# Altium PCB IPM_IGCM10F60GA_xxy_v1_2_1219.PcbDoc
Units mm, origin at the board's own origin, x right, y up, seen from the top; angles counter-clockwise.
Board outline 80.27 x 80.35 mm, 2 copper layers (Top Layer, Bottom Layer); 37 components, 29 nets, 114 pads, 6 vias.
Unrouted connection lines stored in the file: 1.
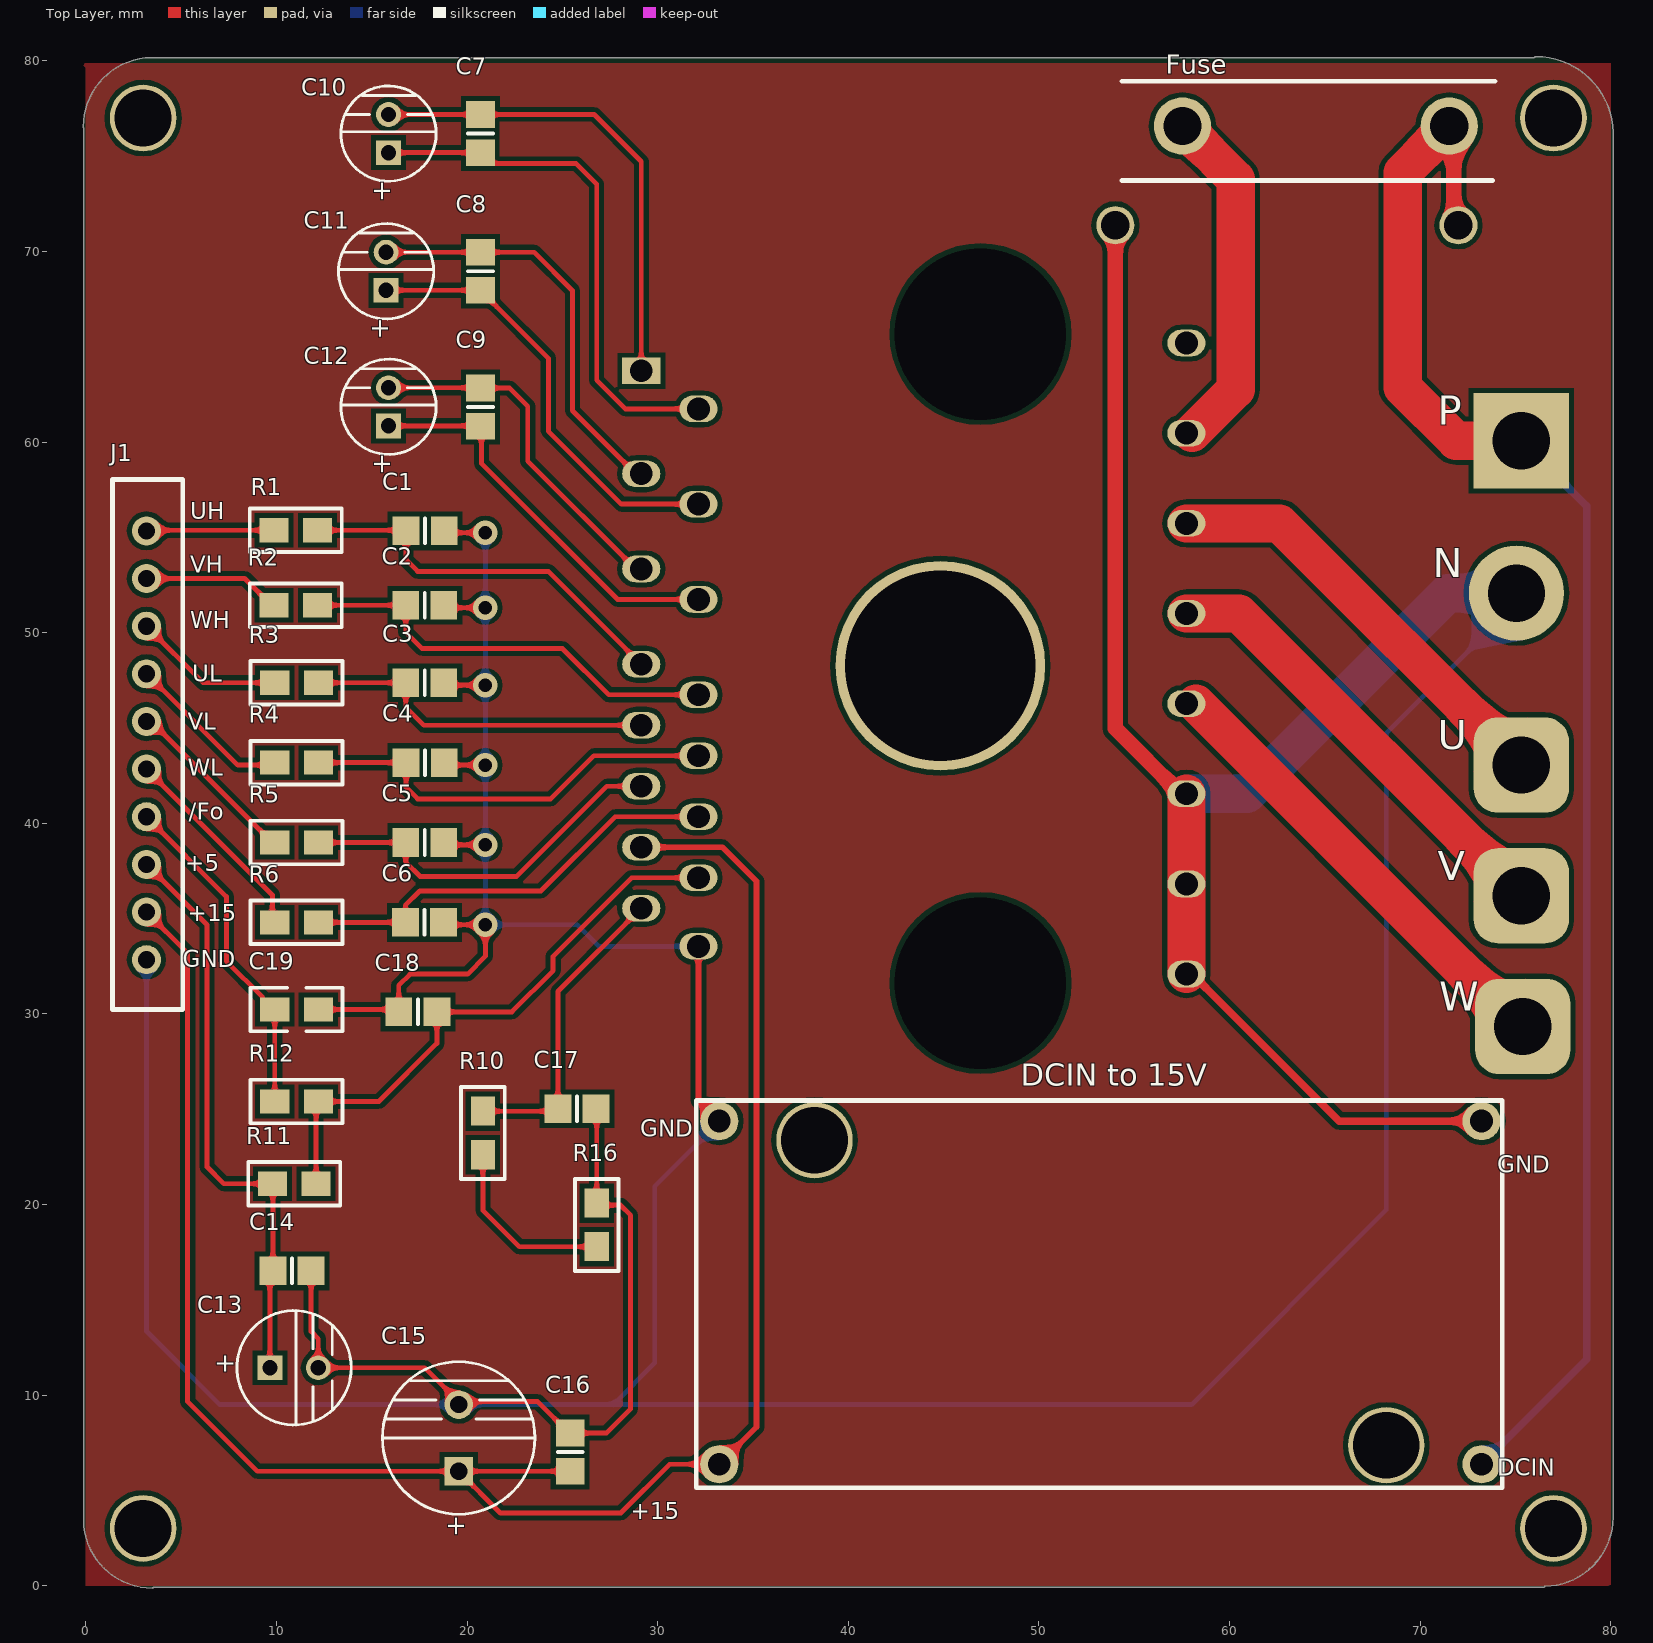
[diagram p0: Top Layer view]
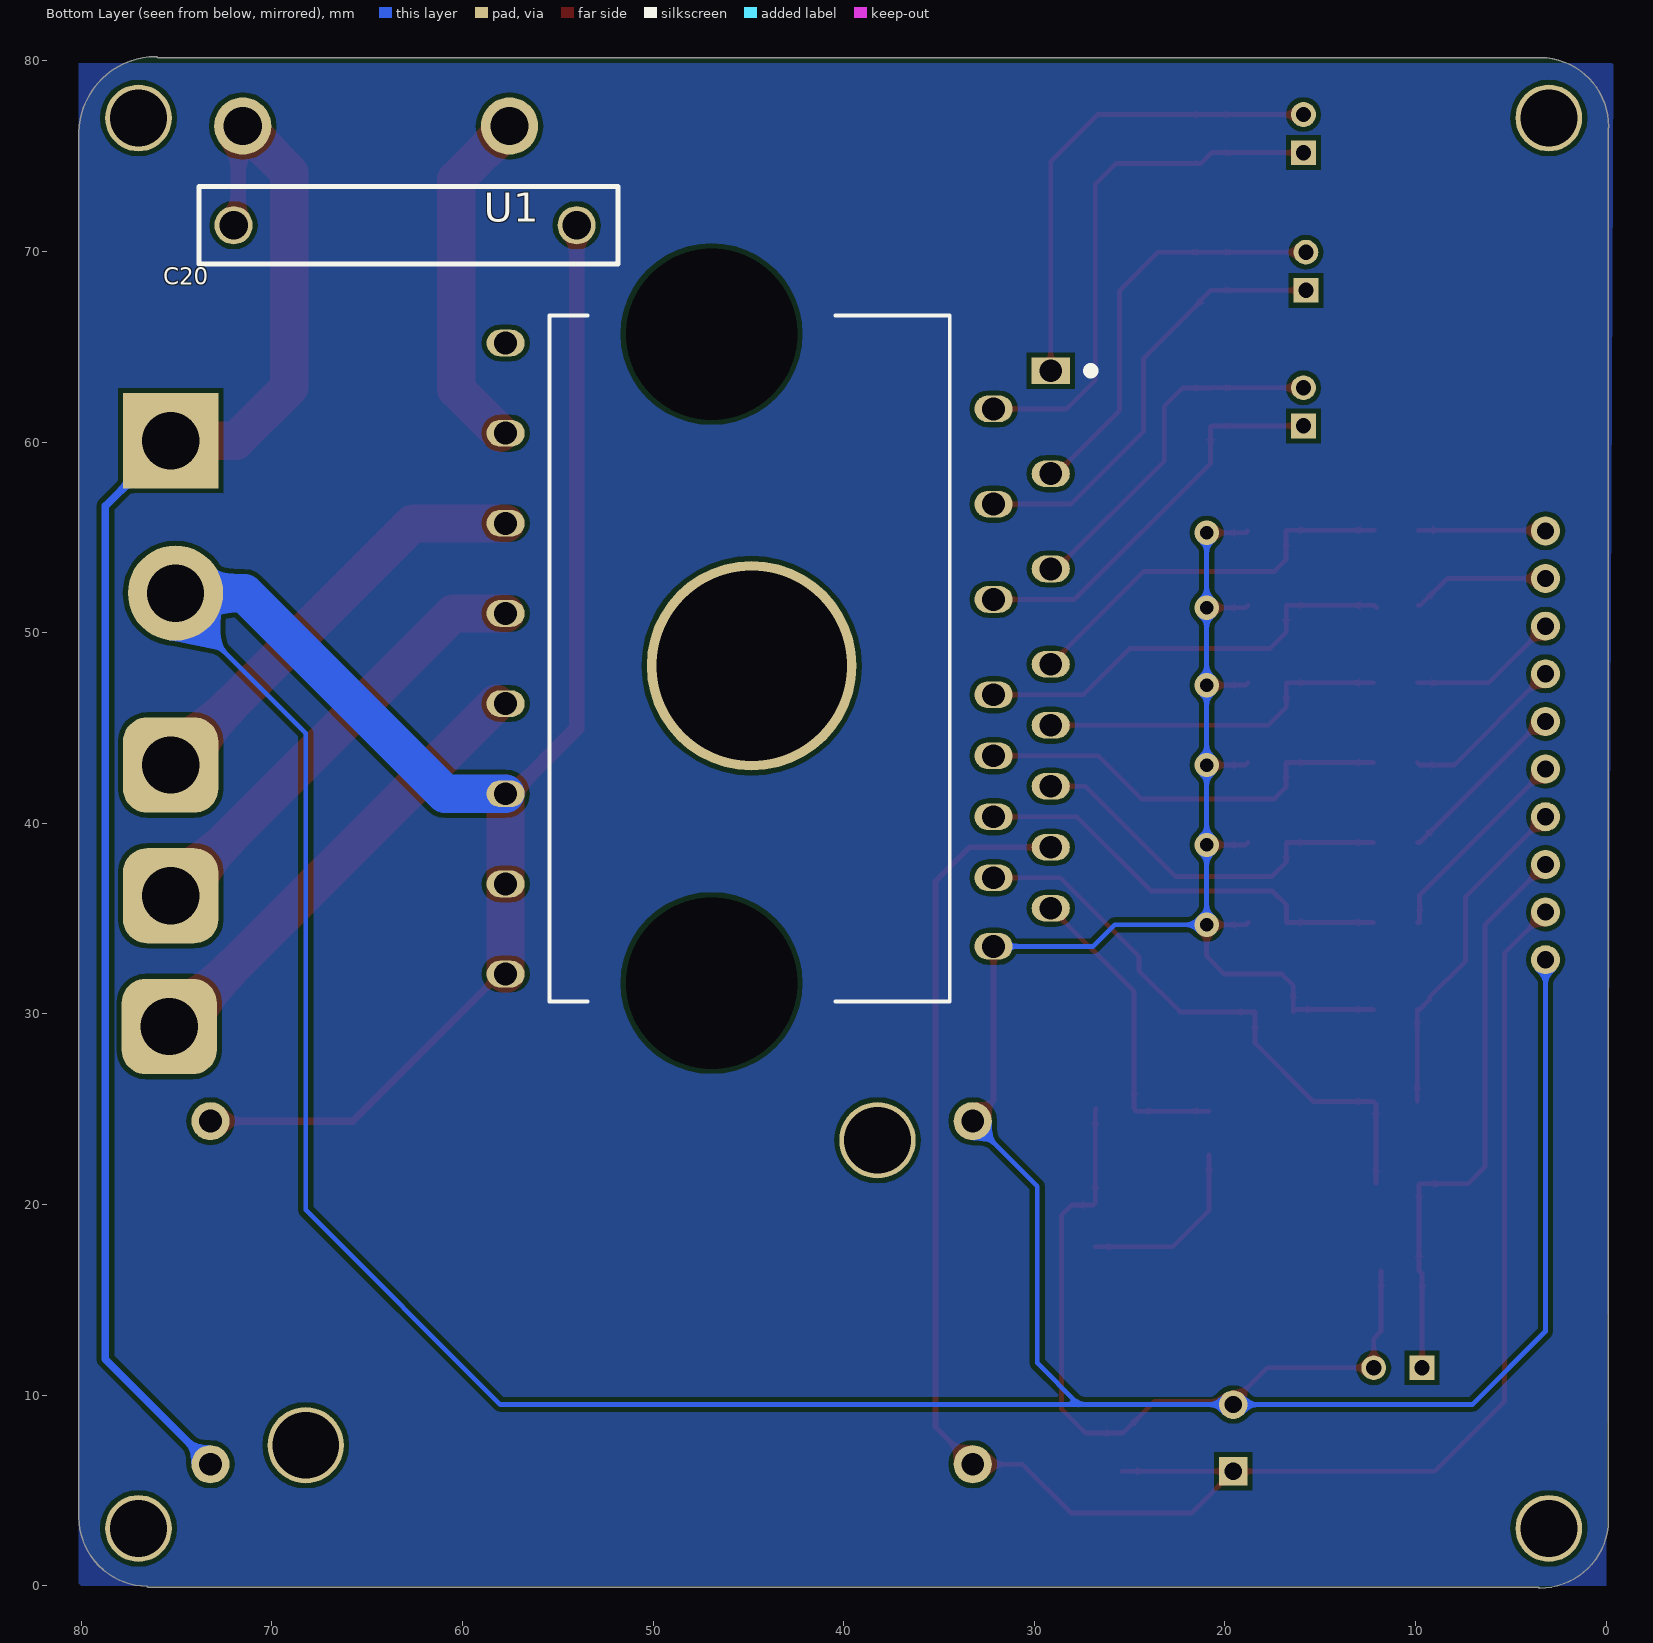
[diagram p1: Bottom Layer view, seen from below]

## Layer stack, top to bottom
Top Solder: solder mask 0.0102, Solder Resist, Dk 3.5
Top Layer: signal copper 0.0356
Dielectric 1: dielectric 0.32, FR-4, Dk 4.8
Bottom Layer: signal copper 0.0356
Bottom Solder: solder mask 0.0102, Solder Resist, Dk 3.5

## Board outline
-0.127,3.402 cw(c0.001,3.404) -0.123,3.434 cw(c0,3.467) -0.127,3.467 -0.127,76.482 cw(c-0.015,76.542) -0.142,76.542 cw(c3.492,76.542) 3.427,80.175 cw(c3.429,80.048) 3.429,80.175 75.99,80.175 cw(c76.086,80.091) 76.086,80.218 cw(c76.086,76.177) 80.127,76.25 cw(c79.999,76.248) 80.127,76.248 cw(c79.999,76.248) 80.122,76.213 cw(c80,76.177) 80.127,76.177 80.127,3.584 cw(c80,3.584) 80.127,3.582 ccw(c76.493,3.594) 80.127,3.594 80.127,3.582 cw(c76.493,3.594) 76.559,-0.04 cw(c76.556,0.088) 76.556,-0.04 cw(c76.464,0.048) 76.464,-0.08 3.566,-0.08 cw(c3.467,0) 3.467,-0.127 cw(c3.467,3.467)

## Design rules (kind name [scope] priority, off if disabled: settings)
Clearance [All] p1: gap=0.254 ignorepadtopadclearanceinfootprint=FALSE except(0: Arc-Hole Track-Hole SMDPad-Hole THPad-Hole Via-Hole Fill-Hole Poly-Hole Region-Hole Text-Hole)
PolygonConnect [All] p1: connectstyle=Relief reliefconductorwidth=0.254 reliefentries=4 polygonreliefangle="90 Angle" airgapwidth=0.254
RoomDefinition IPM_IGCM10F60A_xxy_v1_2 [InComponentClass('IPM_IGCM10F60A_xxy_v1_2')] p1: confinementstyle=ConfineIn formatcopy=TRUE lockcomponents=FALSE outline -0.254,-0.127 80,-0.127 80,79.883 -0.254,79.883
RoutingVias [All] p1: holewidth=0.711 width=1.27 viastyle="Through Hole" minholewidth=0.711 minwidth=1.27 maxholewidth=0.711 maxwidth=1.27
SolderMaskExpansion [All] p1: expansion=0.102
Width [All] p1: maxlimit=3 minlimit=0.254 preferedwidth=0.254 minimp=50.000000 maximp=50.000000 favimp=50.000000
30 further rules are at their usual default settings.

## Components (designator, comment, footprint, x,y, rotation, side; value= is the part's Value field where it differs from the comment)
C1 "" 6-0805_M 17.796,55.339 r180 top
C2 "" 6-0805_M 17.78,51.435 r180 top
C3 "" 6-0805_M 17.78,47.371 r180 top
C4 "" 6-0805_M 17.796,43.18 r180 top
C5 "" 6-0805_M 17.78,38.989 r180 top
C6 "" 6-0805_M 17.764,34.798 r180 top
C7 "" 6-0805_M 20.701,76.184 r90 top
C8 "" 6-0805_M 20.701,68.961 r90 top
C9 "" 6-0805_M 20.701,61.833 r90 top
C10 "" 电解电容5*7mm 15.875,76.184 r90 top
C11 "" 电解电容5*7mm 15.748,68.961 r90 top
C12 "" 电解电容5*7mm 15.875,61.849 r90 top
C13 "" 电解电容6*12mm 10.922,11.43 r0 top
C14 "" 6-0805_M 10.811,16.51 r180 top
C15 "" 电解电容8*12mm 19.558,7.747 r90 top
C16 "" 6-0805_M 25.4,7.003 r270 top
C17 "" 6-0805_M 25.765,25.019 r0 top
C18 "" 6-0805_M 17.415,30.099 r180 top
C19 "" 0805C 12.192,30.226 r180 top
C20 "" 安规电容 63.009,71.374 r0 bottom
J1 "J1(10 pin)" 10_pin_插座 3.175,45.339 r270 top
N "" N_footprint 75.057,52.07 r90 top
P "" P_footprint 75.311,60.071 r90 top
R1 "100" 0805R 9.865,55.372 r0 top
R2 "100" 0805R 9.865,51.435 r0 top
R3 "100" 0805R 9.906,47.371 r0 top
R4 "100" 0805R 9.906,43.18 r0 top
R5 "100" 0805R 9.906,38.989 r0 top
R6 "100" 0805R 9.906,34.798 r0 top
R10 "" 0805R 20.828,24.892 r270 top
R11 "" 0805R 12.074,21.082 r180 top
R12 "" 0805R 12.192,25.4 r180 top
R16 "" 0805R 26.797,17.78 r90 top
U "" U_V_W_footprint 75.311,43.053 r90 top
U1 "IGCM10F60A" "INF-CIPOS MINI" 43.434,48.641 r270 bottom
V "" U_V_W_footprint 75.311,36.195 r90 top
W "" U_V_W_footprint 75.385,29.337 r90 top

## Footprints (in the part's own frame and the unit in brackets; to place one, negate y for a bottom-side part, rotate by r counter-clockwise, add the part's x,y. Pads: shape width x height; smd on the part's side, far side on the other; paste and mask are expansions set on the pad)
6-0805_M [mm] "Chip Resistor, Body 2.0x1.2mm, IPC Low Density"
  rect 1.4x1.5 smd: 1(-1,0) 2(1,0)
  silkscreen extent 0,-0.65 0,0.65, body extent -1.07,-0.7 1.07,0.7, height 0.7
10_pin_插座 [mil]
  round 60 hole 35.43: 1(-393.7,0) 2(-295.28,0) 3(-196.85,0) 4(-98.43,0) 5(0,0) 6(98.43,0) 7(196.85,0) 8(295.28,0) 9(393.7,0) 10(492.13,0)
  silkscreen extent -500,-70 595,75
0805C [mil] "2.0mmx1.2mm（蒜米工坊）"
  rect 60x50 smd: 1(0,0) 2(90,0)
  silkscreen extent -50,-45 140,45, body extent 5,-25 83,25, height 22
0805R [mil]
  rect 60x50 smd: 1(0,0) 2(90,0)
  silkscreen extent -50,-45 140,45, body extent 5,-25 83,25, height 22
"INF-CIPOS MINI" [mm] "CIPOS MINI;24 pin, 21mm W X 36mm L X 5.6mm H body"
  rect 1.4x2 hole 1.2 paste+0 mask+0: 1(-15.1,14.3)
  oval 1.4x2 hole 1.2 paste+0 mask+0: 2(-13.1,11.3) 3(-9.7,14.3) 4(-8.1,11.3) 5(-4.7,14.3) 6(-3.1,11.3) 7(0.3,14.3) 8(1.9,11.3) 9(3.5,14.3) 10(5.1,11.3) 11(6.7,14.3) 12(8.3,11.3) 13(9.9,14.3) 14(11.5,11.3) 15(13.1,14.3) 16(15.1,11.3) 17(16.555,-14.3) 18(11.825,-14.3) 19(7.095,-14.3) 20(2.365,-14.3) 21(-2.365,-14.3) 22(-7.095,-14.3) 23(-11.825,-14.3) 24(-16.555,-14.3)
  round 0 hole 9 unplated paste+0 mask+0: ""(-17.025,-3.5) ""(17.025,-3.5)
  silkscreen extent -18,-12 18,16.6, body extent -18,-14.56 18,14.56, height 5.61
N_footprint [mm]
  round 5 hole 3: 4(0,0)
P_footprint [mm]
  rect 5x5 hole 3: 3(0,0)
U_V_W_footprint [mm]
  rrect50% 5x5 hole 3: 5(0,0)
安规电容 [mm]
  round 2 hole 1.5: 8(-9,0) 8(9,0)
  silkscreen extent -11.18,-2.03 10.82,2.03
电解电容5*7mm [mm]
  rect 1.3x1.3 hole 0.8: 1(-1,0)
  round 1.3 hole 0.8: 2(1,0)
  silkscreen extent -2.5,-2.5 2.5,2.5
电解电容6*12mm [mm]
  rect 1.3x1.3 hole 0.8: 1(-1.27,0)
  round 1.3 hole 0.8: 2(1.27,0)
  silkscreen extent -3,-3 3,3
电解电容8*12mm [mm]
  rect 1.5x1.5 hole 0.9: 1(-1.75,0)
  round 1.5 hole 0.9: 2(1.75,0)
  silkscreen extent -4,-4 4,4

## Part data
C1 C2 C3 C4 C5 C6 C7 C8 C9 C14 C16 C17 C18 C19 C20: library part C, "无极性贴片电容", BOM名称=无, 学习资源=www.oooc
C10 C11 C12 C13 C15: library part C-CAP, "直插电解电容", BOM名称=ֱ, 学习资源=www.oooc
N P U V W: library part 输出端口
R1 R2 R3 R4 R5 R6 R10 R11 R12 R16: library part R, "贴片电阻", BOM名称=Ì, 学习资源=www.oooc
U1: library part Component_1

## Free pads (board coordinates)
  round 3 hole 2: 18(57.531,76.581) 18(71.531,76.581)
  round 4 hole 3.5: 21(38.227,23.368) 21(68.227,7.368)
  round 2 hole 1.2: 22(33.227,6.368) 22(33.227,24.368) 22(73.227,6.368) 22(73.227,24.368)
  round 3.5 hole 3: 25(3,3) 25(3,77) 25(77,3) 25(77,77)
  round 11 hole 10: 26(44.831,48.26)

## Via types
v1: diameter 1.27, hole 0.711, Top Layer to Bottom Layer, 6 vias

## Nets (pads, with @x,y where several pads share a name; then routed paths per layer and width w, separated by ;. In a path a pad name is that pad's centre, name@x,y a point inside that pad or via, vN(x,y) a via of type N, cw(c..) or ccw(c..) an arc to the next point about the centre after c; other vN are vias at no path point)
+5: C13.1 C14.2 J1.8 R11.2 | length 30.7
  Top Layer w0.254: J1.8 6.35,34.664 6.35,21.971 7.239,21.082 R11.2 9.811,21.059 C14.2 9.652,16.351 C13.1
+15: C15.1 C16.2 J1.9 pad.22@33.227,6.368 U1.13 | length 102.2
  Top Layer w0.254: J1.9 5.334,33.18 5.334,9.652 8.989,5.997 C15.1 ; C16.2 25.394,5.997 C15.1 ; U1.13@28.898,38.741 U1.13 ; pad.22@33.227,6.368 30.625,6.368 28.067,3.81 21.745,3.81 C15.1
  Top Layer w0.3: U1.13 33.395,38.741 35.179,36.957 35.179,8.32 pad.22@33.227,6.368
GND: C1.1 C2.1 C3.1 C4.1 C5.1 C6.1 C13.2 C14.1 C15.2 C16.1 C17.2 C18.2 C19.1 C20.8@54.009,71.374 J1.10 N.4 pad.22@33.227,24.368 pad.22@73.227,24.368 R16.2 U1.16 U1.17 U1.18 U1.19 | length 333.4
  Top Layer w0.254: C14.1 11.811,13.335 12.192,12.954 C13.2 17.78,11.43 19.558,9.652 C15.2 19.713,9.652 23.701,9.652 C16.1@25.273,8.08 ; C19.1 16.288,30.226 C18.2 16.415,31.496 17.005,32.086 20.021,32.086 20.955,33.02 v1(20.955,34.671) 18.891,34.671 C6.1 ; C5.1 18.907,38.862 v1(20.955,38.862) ; C3.1 18.907,47.244 v1(20.955,47.244) ; C2.1 18.907,51.308 v1(20.955,51.308) ; C4.1 18.923,43.053 v1(20.955,43.053) ; C1.1 18.89,55.245 v1(20.955,55.245) ; C16.1@25.35,8.003 C16.1 27.307,8.003 28.575,9.271 28.575,19.431 28.045,19.961 26.902,19.961 R16.2 26.797,24.987 C17.2 ; U1.19@57.434,41.546 U1.19 ; U1.17 U1.17@58.034,32.086
  Top Layer w0.3: U1.16 32.134,25.461 pad.22@33.227,24.368
  Top Layer w0.4: U1.17@58.034,32.086 65.752,24.368 pad.22@73.227,24.368
  Top Layer w0.8: C20.8@54.009,71.374 54.009,44.971 U1.19@57.434,41.546
  Top Layer w2: U1.17 U1.18 U1.19
  Bottom Layer w0.254: J1.10 3.175,13.335 7.013,9.497 C15.2 27.658,9.497 ; v1(20.955,55.245) v1(20.955,51.308) v1(20.955,47.244) v1(20.955,43.053) v1(20.955,38.862) v1(20.955,34.671) 25.781,34.671 26.911,33.541 U1.16 ; pad.22@33.227,24.368 33.227,24.337 29.845,20.955 29.845,11.684 27.658,9.497 ; N.4@75.565,52.07 68.227,44.732 68.227,19.713 58.011,9.497 27.658,9.497
  Bottom Layer w2: U1.19 60.925,41.546 71.449,52.07 N.4 N.4@75.565,52.07
NetC1_2: C1.2 R1.2 U1.7 | length 20.8
  Top Layer w0.254: R1.2 16.763,55.372 C1.2 16.796,53.816 17.399,53.213 24.262,53.213 U1.7
NetC2_2: C2.2 R2.2 U1.8 | length 22.9
  Top Layer w0.254: R2.2@12.024,51.308 R2.2 C2.2 16.78,50.022 17.637,49.165 25.003,49.165 27.427,46.741 U1.8
NetC3_2: C3.2 R3.2 U1.9 | length 18.6
  Top Layer w0.254: R3.2 C3.2 16.78,46.085 17.724,45.141 U1.9
NetC4_2: C4.2 R4.2 U1.10 | length 22.4
  Top Layer w0.254: R4.2 C4.2 16.796,41.878 17.399,41.275 24.384,41.275 26.65,43.541 U1.10
NetC5_2: C5.2 R5.2 U1.11 | length 20.2
  Top Layer w0.254: R5.2 C5.2 16.78,37.957 17.526,37.211 22.606,37.211 27.336,41.941 U1.11
NetC6_2: C6.2 R6.2 U1.12 | length 22.8
  Top Layer w0.254: R6.2 C6.2 16.764,35.687 17.526,36.449 23.876,36.449 27.766,40.339 32.132,40.339 U1.12
NetC7_1: C7.1 C10.1 U1.2 | length 27.9
  Top Layer w0.254: C10.1 C7.1 21.274,74.611 25.719,74.611 26.797,73.533 26.797,63.246 28.302,61.741 U1.2
NetC7_2: C7.2 C10.2 U1.1 | length 25.3
  Top Layer w0.254: C10.2 C7.2 26.67,77.184 29.134,74.72 U1.1
NetC8_1: C8.1 C11.1 U1.4 | length 23.3
  Top Layer w0.254: C11.1 C8.1 20.751,67.961 21.324,67.388 21.324,67.338 24.262,64.4 24.262,60.574 28.095,56.741 U1.4
NetC8_2: C8.2 C11.2 U1.3 | length 21.9
  Top Layer w0.254: C11.2 C8.2 23.511,69.961 25.527,67.945 25.527,61.648 28.834,58.341 U1.3
NetC9_1: C9.1 C12.1 U1.6 | length 21.2
  Top Layer w0.254: C12.1 20.685,60.849 C9.1 20.751,60.833 20.751,58.878 27.888,51.741 U1.6
NetC9_2: C9.2 C12.2 U1.5 | length 18.9
  Top Layer w0.254: C12.2 20.685,62.849 C9.2 22.225,62.833 23.178,61.88 23.178,58.997 28.834,53.341 U1.5
NetC17_1: C17.1 R10.1 U1.15 | length 16.3
  Top Layer w0.254: R10.1 24.638,24.892 C17.1 24.765,31.172 U1.15
NetC18_1: C18.1 R11.1 R12.1 U1.14 | length 30.6
  Top Layer w0.254: R11.1 12.074,25.282 R12.1 15.367,25.4 18.415,28.448 C18.1 22.352,30.099 24.511,32.258 24.511,33.02 28.632,37.141 U1.14
NetC19_2: C19.2 J1.7 R12.2 | length 17.8
  Top Layer w0.254: J1.7 7.366,36.148 7.366,32.766 9.271,30.861 9.271,30.734 9.779,30.226 C19.2 R12.2
NetC20_2: C20.8@72.009,71.374 P.3 pad.18 pad.22@73.227,6.368 U1.23 | length 104.5
  Top Layer w0.254: pad.18@57.531,76.581 57.531,75.946 pad.18@58.166,75.946 ; U1.23 U1.23@58.034,60.466 ; pad.18@70.634,75.684 70.634,75.73 70.515,75.849 71.531,75.849 71.531,76.581 pad.18@71.77,76.342 ; C20.8@71.77,71.613 C20.8@72.009,71.374
  Top Layer w0.8: C20.8@71.77,71.613 pad.18@71.77,76.342
  Top Layer w2: U1.23@58.034,60.466 60.325,62.757 60.325,73.787 pad.18@58.166,75.946 ; pad.18@70.634,75.684 69.088,74.138 69.088,62.865 71.882,60.071 P.3
  Bottom Layer w0.4: pad.22@73.227,6.368 78.74,11.881 78.74,52.461 78.74,56.642 P.3
NetJ1_1: J1.1 R1.1 | length 6.7
  Top Layer w0.254: J1.1 3.208,55.372 R1.1
NetJ1_2: J1.2 R2.1 | length 7.3
  Top Layer w0.254: J1.2 8.334,52.839 9.738,51.435 R2.1
NetJ1_3: J1.3 R3.1 | length 8
  Top Layer w0.254: J1.3 6.143,47.371 R3.1
NetJ1_4: J1.4 R4.1 | length 9.1
  Top Layer w0.254: J1.4@3.342,47.839 J1.4 3.175,47.625 3.389,47.625 7.961,43.053 9.779,43.053 R4.1
NetJ1_5: J1.5 R5.1 | length 9.4
  Top Layer w0.254: J1.5 3.429,45.339 9.779,38.989 R5.1
NetJ1_6: J1.6 R6.1 | length 10.9
  Top Layer w0.254: J1.6 9.779,36.235 9.779,34.798 R6.1
NetR10_2: R10.2 R16.1 | length 9.7
  Top Layer w0.254: R10.2 20.828,19.685 22.733,17.78 R16.1
NetU1_20: U1.20 W.5 | length 24.7
  Top Layer w0.254: U1.20 U1.20@58.24,46.276 ; W.5@75.179,29.337 W.5
  Top Layer w2: U1.20@58.24,46.276 W.5@75.179,29.337
NetU1_21: U1.21 V.5 | length 23.7
  Top Layer w2: U1.21 60.5,51.006 V.5
NetU1_22: U1.22 U.5 | length 22.8
  Top Layer w2: U1.22 62.628,55.736 U.5
pads on no net: U1. U1.24

## Polygon pours and split planes (outlines as drawn)
no net on Top Layer "Top Layer-No Net" (solid, pour order 2): -0.254,80.01 -0.127,79.883 80,79.883 80,-0.127 79.873,0 0,0 0,79.629 -0.254,79.883
no net on Bottom Layer "Bottom Layer-No Net" (solid, pour order 4): -0.381,79.883 80.137,79.883 80.137,0.127 80.01,0 0,0

## Silkscreen, mask and mechanical layers (free items; w line width, h text height)
Top Overlay:
  lines w0.254: 54.364,73.725 73.795,73.725 ; 54.364,78.932 73.922,78.932 ; 32.022,5.13 74.313,5.13 74.313,25.45 32.022,25.45 32.022,5.13
  text "Fuse" at 56.65,79.313 h1
  text "UH" at 5.461,55.626 h1.52
  text "VH" at 5.461,52.832 h1.52
  text "WH" at 5.461,49.911 h1.52
  text "UL" at 5.588,47.117 h1.52
  text "VL" at 5.334,44.577 h1.52
  text "WL" at 5.334,42.164 h1.52
  text "/Fo" at 5.381,39.878 h1.52
  text "+5" at 5.207,37.171 h1.52
  text "+15" at 5.334,34.544 h1.52
  text "GND" at 5.08,32.131 h1.52
  text "DCIN to 15V" at 49.04,25.831 h2
  text "GND" at 29.083,23.241 h1.52
  text "GND" at 74.041,21.336 h1.52
  text "DCIN" at 74.041,5.461 h1.52
  text "+15" at 28.575,3.175 h1.52
Mechanical 1:
  lines w0.254: -0.015,76.542 cw(c3.492,76.542) 3.429,80.048 76.086,80.048 ; 0.001,3.404 ccw(c3.467,3.467) 3.467,0 ; 0,3.467 0,76.619 ; 3.467,0.048 76.464,0.048 ; 76.086,80.091 cw(c76.086,76.177) 79.999,76.248 ; 76.556,0.088 ccw(c76.493,3.594) 80,3.594 ; 80,3.584 80,76.177

## Text inside footprints (layer, text, board x,y; h text height)
C10: Top Overlay "+" at 15.975,72.584 h1.02 r90
C11: Top Overlay "+" at 15.848,65.361 h1.02 r90
C12: Top Overlay "+" at 15.975,58.249 h1.02 r90
C13: Top Overlay "+" at 6.722,11.23 h1.02
C15: Top Overlay "+" at 19.858,2.547 h1.02 r90